# Altium PCB 盛群杯.PcbDoc
Units mil, origin at the board's own origin, x right, y up, seen from the top; angles counter-clockwise.
Board outline 6000 x 4000 mil, 2 copper layers (Top Layer, Bottom Layer); 18 components, 34 nets, 111 pads, 0 vias.
Unrouted connection lines stored in the file: 22.
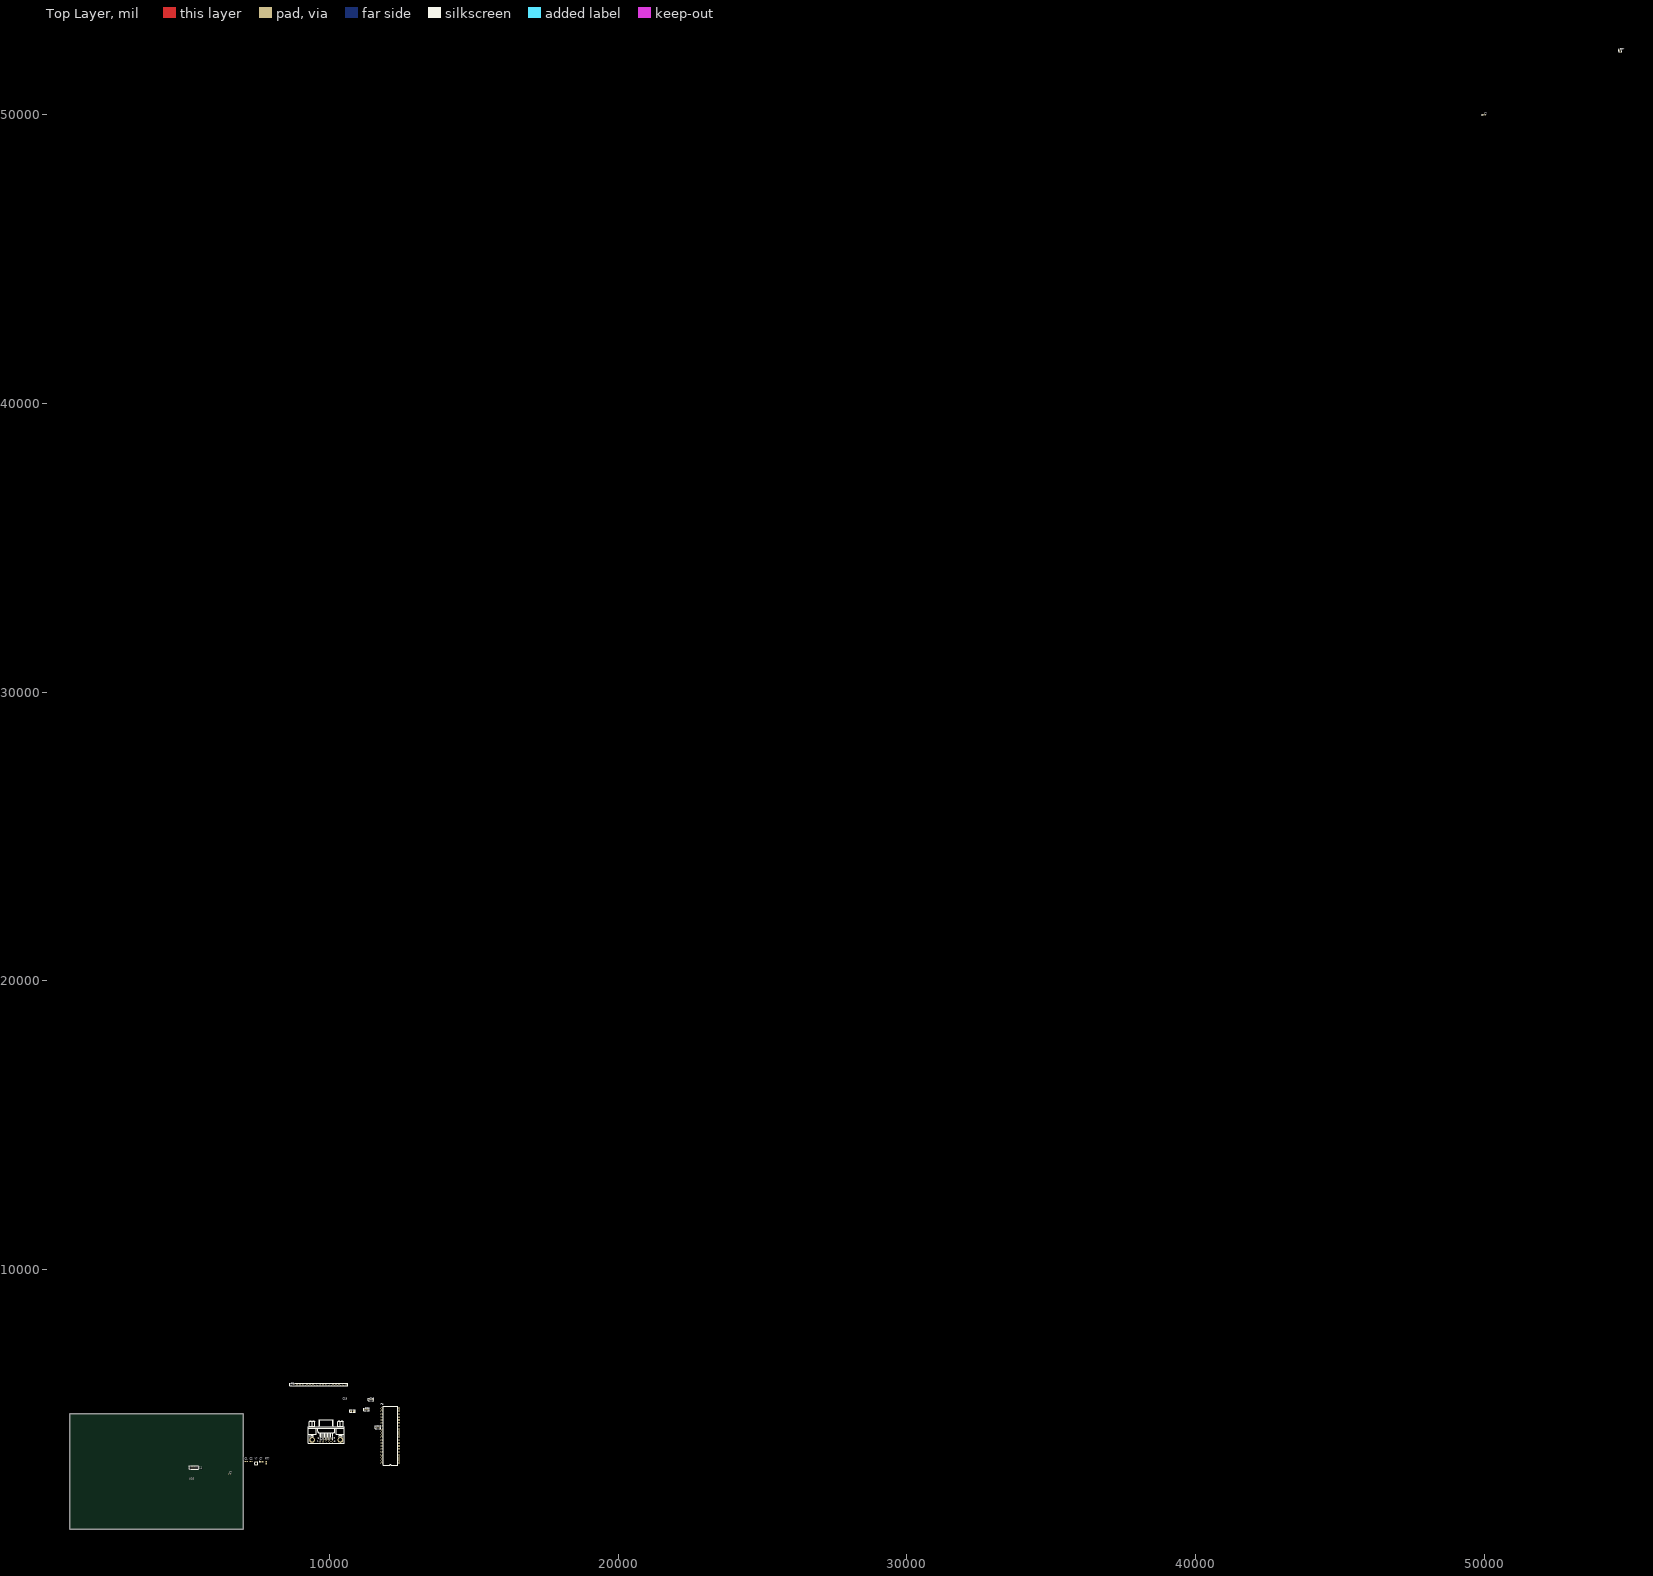
[diagram p0: Top Layer view]
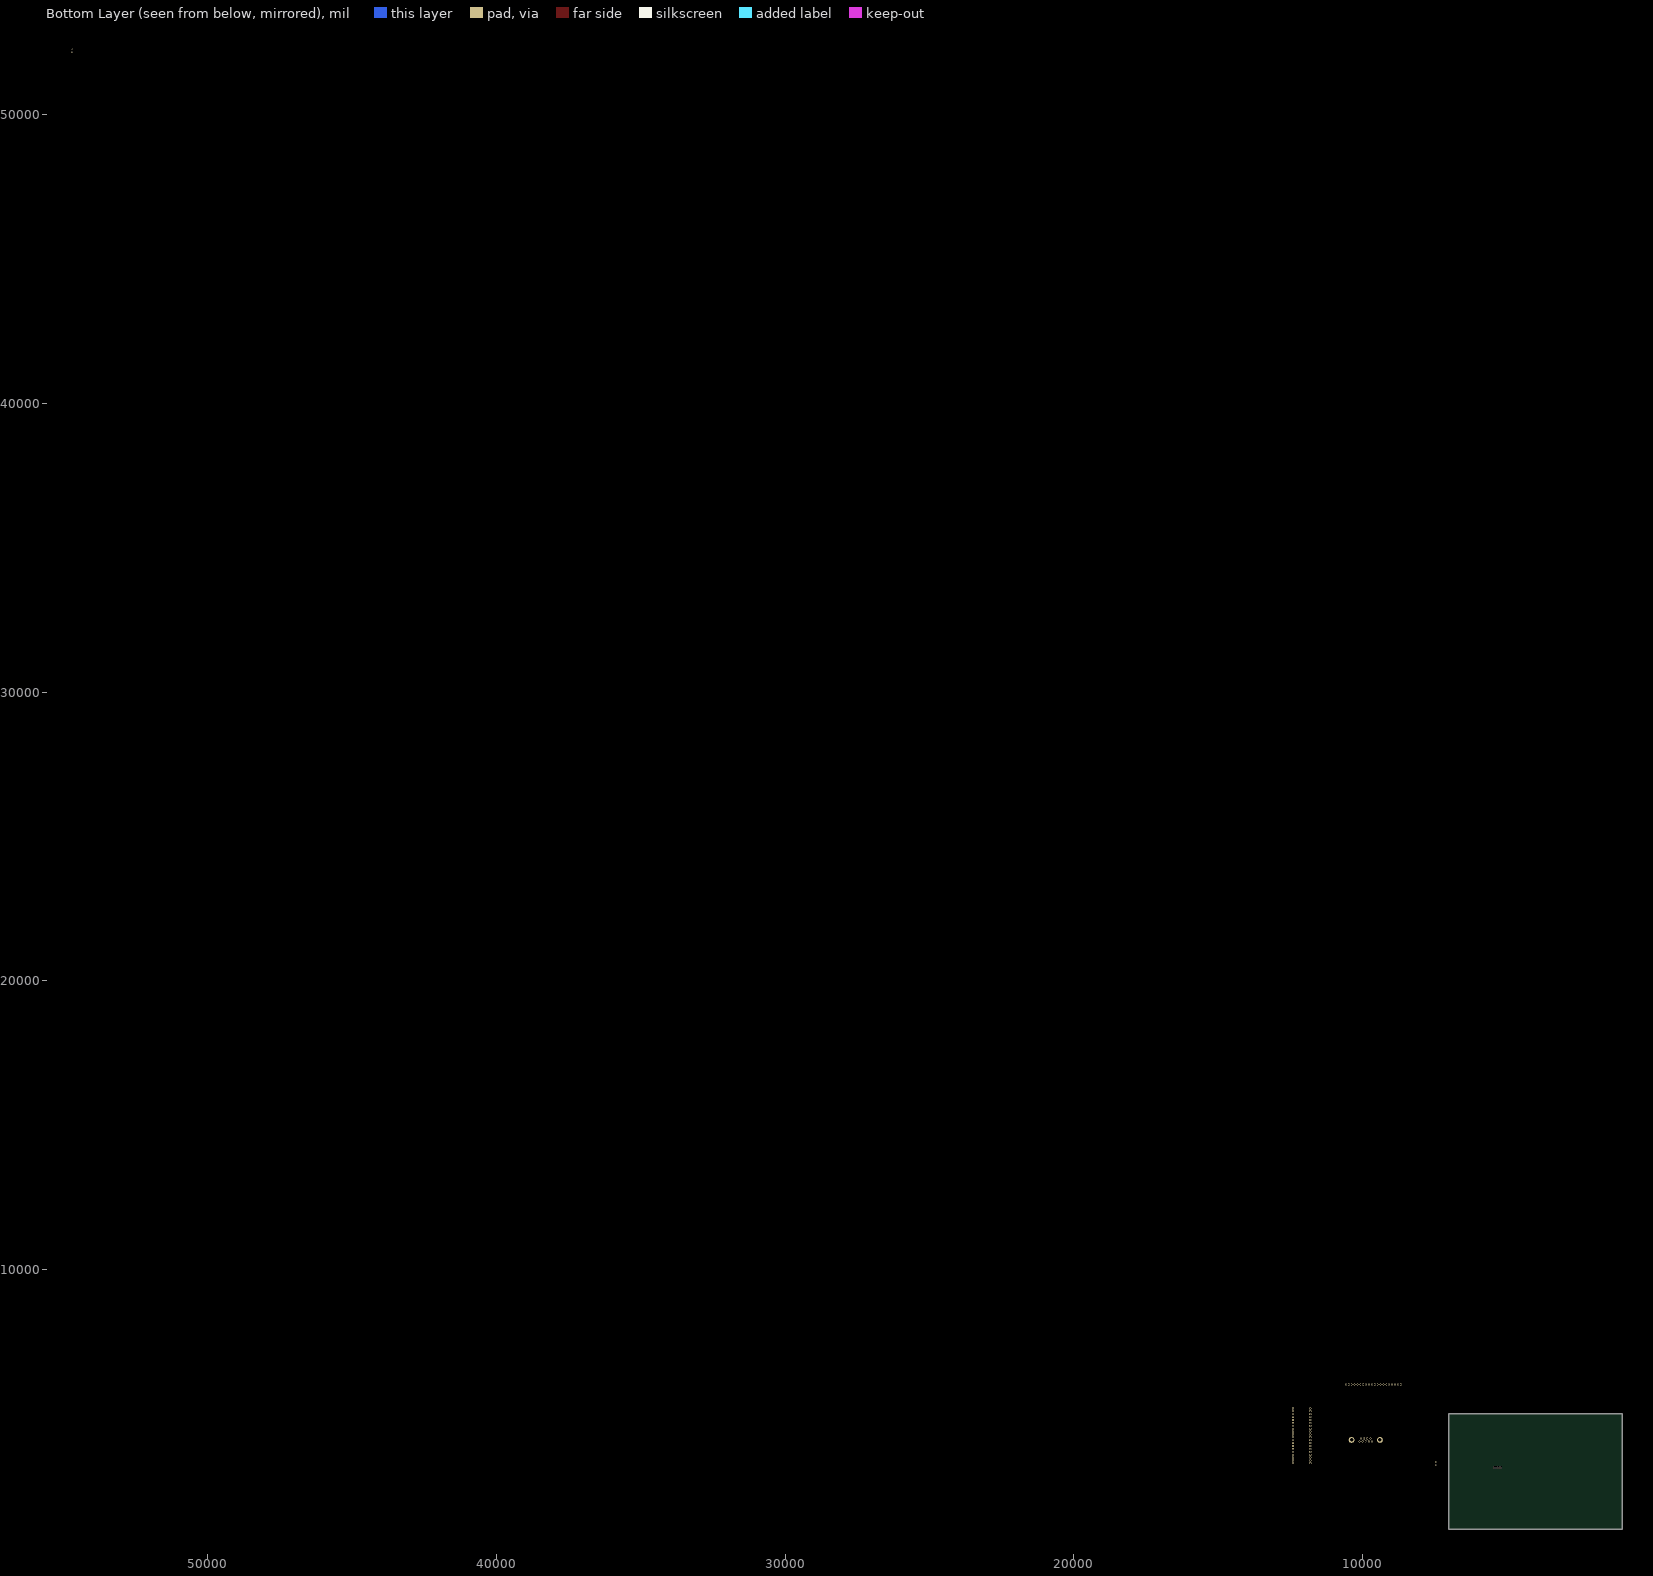
[diagram p1: Bottom Layer view, seen from below]

## Layer stack, top to bottom
Top Layer: signal copper 1.4
Dielectric: dielectric 12.6, FR-4, Dk 4.8
Bottom Layer: signal copper 1.4

## Board outline
1000,1000 7000,1000 7000,5000 1000,5000

## Design rules (kind name [scope] priority, off if disabled: settings)
Clearance [All] p1: gap=10
ComponentClearance [All] p1: gap=10 collisioncheckmode=3 verticalgap=10
PolygonConnect [All] p1: connectstyle=Relief reliefconductorwidth=10 reliefentries=4 polygonreliefangle="90 Angle"
RoomDefinition 盛群杯 [InComponentClass('盛群杯')] p1: confinementstyle=ConfineIn formatcopy=TRUE lockcomponents=FALSE outline 11755,3200 13195,3200 13195,5715 11755,5715
RoomDefinition 最小系统 [InComponentClass('最小系统')] p2: confinementstyle=ConfineIn formatcopy=TRUE lockcomponents=FALSE outline 7045,3180 7955,3180 7955,3480 7045,3480
RoutingVias [All] p1: holewidth=28 width=50 viastyle="Through Hole" minholewidth=28 minwidth=50 maxholewidth=28 maxwidth=50
SolderMaskExpansion [All] p1: expansion=4
TestPointUsage [All] p1: valid=0 allowmultiple=FALSE
Testpoint [All] p1: side=15 testpointundercomponent=TRUE minsize=40 maxsize=100 preferedsize=60 minholesize=0 maxholesize=40 preferedholesize=32 testpointgrid=1 style=1023 order=0123456789
Width [All] p1: maxlimit=10 minlimit=10 preferedwidth=10
18 further rules are at their usual default settings.

## Classes and differential pairs
component class 盛群杯: C16 C17 C19 C20 C? J? P1 P2 P5 RT? U1 U2 U4 U15 Y?
component class 最小系统: C1 C2 C? RT? U2 U10 Y?

## Components (designator, comment, footprint, x,y, rotation, side; value= is the part's Value field where it differs from the comment)
C1 "Cap Semi" 1608[0603] 7110,3350 r0 top
C2 "Cap Semi" 1608[0603] 7280,3350 r0 top
C16 "Cap" 0805 11390,5495 r0 top
C17 "Cap" 0805 11630,4535 r0 top
C19 "Cap" 0805 10750,5095 r0 top
C20 "Cap" 0805 11239.5,5154.5 r0 top
C? "Cap Pol3" C0805 7650,3340 r0 top
C? "Cap Semi" 1608[0603] 6529.5,2919.5 r0 top
C? "Cap Semi" 1608[0603] 11239.5,5154.5 r0 top
C? "Cap Pol3" C0805 49999.5,49999.5 r0 top
J? "DB9" DB_9 9670,4055 r0 top
P2 "Header 20H" HDR1X20 8670,6015 r0 top
P5 "MHDR1X2" PCBComponent_1 11115,8235 r90 top
RT? "" 6-0805 7800,3305 r90 top
RT? "" 6-0805 54709.5,52234.5 r0 top
U10 "CON12" MHDR2X6 5180,3120 r0 top
Y? "XTAL" R38 7455,3280 r0 top
Y? "XTAL" R38 54709.5,52234.5 r0 top

## Footprints (in the part's own frame and the unit in brackets; to place one, negate y for a bottom-side part, rotate by r counter-clockwise, add the part's x,y. Pads: shape width x height; smd on the part's side, far side on the other; paste and mask are expansions set on the pad)
6-0805 [mm] "Chip Resistor; Body 2.0 x 1.3 mm (LxW typ)"
  rect 1.3x1.5 smd: 1(-0.95,0) 2(0.95,0)
0805 [mil]
  rect 60x50 smd: 1(0,0) 2(90,0)
  silkscreen extent -50,-45 140,45
1608[0603] [mm] "Chip Capacitor; Body 1.6 x 0.8 mm (LxW typ)"
  rect 1.1x1 smd: 1(-0.85,0) 2(0.85,0)
C0805 [mm] "Chip Capacitor; Body 2.0 x 1.2 mm (LxW typ)"
  rect 1.3x1.5 smd: 1(-0.95,0) 2(0.95,0)
  silkscreen extent -1.9,-0.65 -1.9,0.65
DB_9 [mil]
  round 62 hole 35: 1(-5.6,-10.94) 2(103.56,-10.94) 3(212.73,-10.94) 4(321.9,-10.94) 6(48.56,89.06) 7(157.73,89.06) 8(266.9,89.06) 9(376.06,89.06)
  oct 62x62 hole 35: 5(431.06,-10.94)
  round 196.66 hole 118.33: GND(-279.77,39.05) GND(704.4,39.05)
  silkscreen extent -404,-78 829,739
HDR1X20 [mm] "Connector; Header; 20 Position"
  rect 1.5x1.5 hole 0.9: 1(0,0)
  round 1.5 hole 0.9: 2(2.54,0) 3(5.08,0) 4(7.62,0) 5(10.16,0) 6(12.7,0) 7(15.24,0) 8(17.78,0) 9(20.32,0) 10(22.86,0) 11(25.4,0) 12(27.94,0) 13(30.48,0) 14(33.02,0) 15(35.56,0) 16(38.1,0) 17(40.64,0) 18(43.18,0) 19(45.72,0) 20(48.26,0)
  silkscreen extent -1.27,-1.27 49.53,1.27
MHDR2X6 [mm] "Connector; Header; 6x2 Position"
  rect 1x1 hole 0.6: 1(0,0)
  round 1 hole 0.6: 2(0,1.27) 3(1.27,0) 4(1.27,1.27) 5(2.54,0) 6(2.54,1.27) 7(3.81,0) 8(3.81,1.27) 9(5.08,0) 10(5.08,1.27) 11(6.35,0) 12(6.35,1.27)
  silkscreen extent -0.9,-0.9 7.25,2.17
PCBComponent_1 [mm]
  rect 1.5x2 hole 0.9: 1(-125.73,-32.766)
  oval 1.5x2 hole 0.9: 2(-123.19,-32.766) 3(-120.65,-32.766) 4(-118.11,-32.766) 5(-115.57,-32.766) 6(-113.03,-32.766) 7(-110.49,-32.766) 8(-107.95,-32.766) 9(-105.41,-32.766) 10(-102.87,-32.766) 11(-100.33,-32.766) 12(-97.79,-32.766) 13(-95.25,-32.766) 14(-92.71,-32.766) 15(-90.17,-32.766) 16(-87.63,-32.766) 17(-85.09,-32.766) 18(-82.55,-32.766) 19(-80.01,-32.766) 20(-77.47,-32.766) 21(-77.47,-17.526) 22(-80.01,-17.526) 23(-82.55,-17.526) 24(-85.09,-17.526) 25(-87.63,-17.526) 26(-90.17,-17.526) 27(-92.71,-17.526) 28(-95.25,-17.526) 29(-97.79,-17.526) 30(-100.33,-17.526) 31(-102.87,-17.526) 32(-105.41,-17.526) 33(-107.95,-17.526) 34(-110.49,-17.526) 35(-113.03,-17.526) 36(-115.57,-17.526) 37(-118.11,-17.526) 38(-120.65,-17.526) 39(-123.19,-17.526) 40(-125.73,-17.526)
  silkscreen extent -127.65,-31.6 -75.55,-18.7
R38 [mm] "Crystal, Thru-Hole; 2 Leads; Body 3.1 x 8.2 mm (Dia.xH)"
  round 1.3 hole 0.7: 1(0,1.55) 2(0,-1.55)
  silkscreen extent -1.55,-1.19 1.55,1.17

## Part data
C1 C2 C? C?: "Capacitor (Semiconductor SIM Model)"
C16 C17 C19 C20: "Capacitor"
C? C?: "Polarized Capacitor (Surface Mount)"
P2: "Header, 20-Pin, Right Angle"
P5: "Header, 2-Pin"
RT? RT?: library part "Res Thermal", "Thermistor"
Y? Y?: "Crystal Oscillator"

## Nets (pads, with @x,y where several pads share a name; then routed paths per layer and width w, separated by ;. In a path a pad name is that pad's centre, name@x,y a point inside that pad or via, vN(x,y) a via of type N, cw(c..) or ccw(c..) an arc to the next point about the centre after c; other vN are vias at no path point)
CS: 
DB0: P2.7 U10.9
DB1: P2.8
DB2: P2.9
DB3: P2.10
DB4: P2.11
DB5: P2.12
DB6: P2.13
DB7: P2.14
DGND+5: C17.2 C20.2 J?.5
DVCC+3.3: 
GND: C1.2 C2.2 C?.2@11272.96,5154.5 C?.2@50036.9,49999.5 P2.1 P2.19 U10.11
NetC16_1: C16.1
NetC16_2: C16.2
NetC17_1: C17.1
NetC19_1: C19.1
NetC19_2: C19.2
NetC20_1: C20.1
NetP1_1: 
NetP1_2: 
NetP5_1: P5.1
NetP5_2: P5.2
OSC1: C2.1 Y?.2
OSC2: C1.1 Y?.1
R2IN: J?.3
R2OUT: 
RES: C?.1@11206.04,5154.5 RT?.2 U10.2
RESB: 
SCK: U10.5
SDI: 
SDO: 
T2IN: 
T2OUT: J?.2
VCC: P2.2 P2.15 P2.16 P2.20 RT?.1 U10.1
pads on no net: C?.1@6496.04,2919.5 C?.1@7612.6,3340 C?.1@49962.1,49999.5 C?.2@6562.96,2919.5 C?.2@7687.4,3340 J?.1 J?.4 J?.6 J?.7 J?.8 J?.9 J?.GND P2.3 P2.4 P2.5 P2.6 P2.17 P2.18 P5.3 P5.4 P5.5 P5.6 P5.7 P5.8 P5.9 P5.10 P5.11 P5.12 P5.13 P5.14 P5.15 P5.16 P5.17 P5.18 P5.19 P5.20 P5.21 P5.22 P5.23 P5.24 P5.25 P5.26 P5.27 P5.28 P5.29 P5.30 P5.31 P5.32 P5.33 P5.34 P5.35 P5.36 P5.37 P5.38 P5.39 P5.40 U10.3 U10.4 U10.6 U10.7 U10.8 U10.10 U10.12

## Text inside footprints (layer, text, board x,y; h text height)
J?: Top Overlay "6" at 9582.73,4114.06 h50; Top Overlay "1" at 9562.73,4014.05 h50; Top Overlay "5" at 10162.73,4014.05 h50; Top Overlay "9" at 10142.73,4114.06 h50
U10: Top Overlay "1" at 5120,3100 h39.37; Top Overlay "11" at 5480,3100 h39.37